# EAGLE board IIITDuino Ver0.4 (EAGLE 7.5.0)
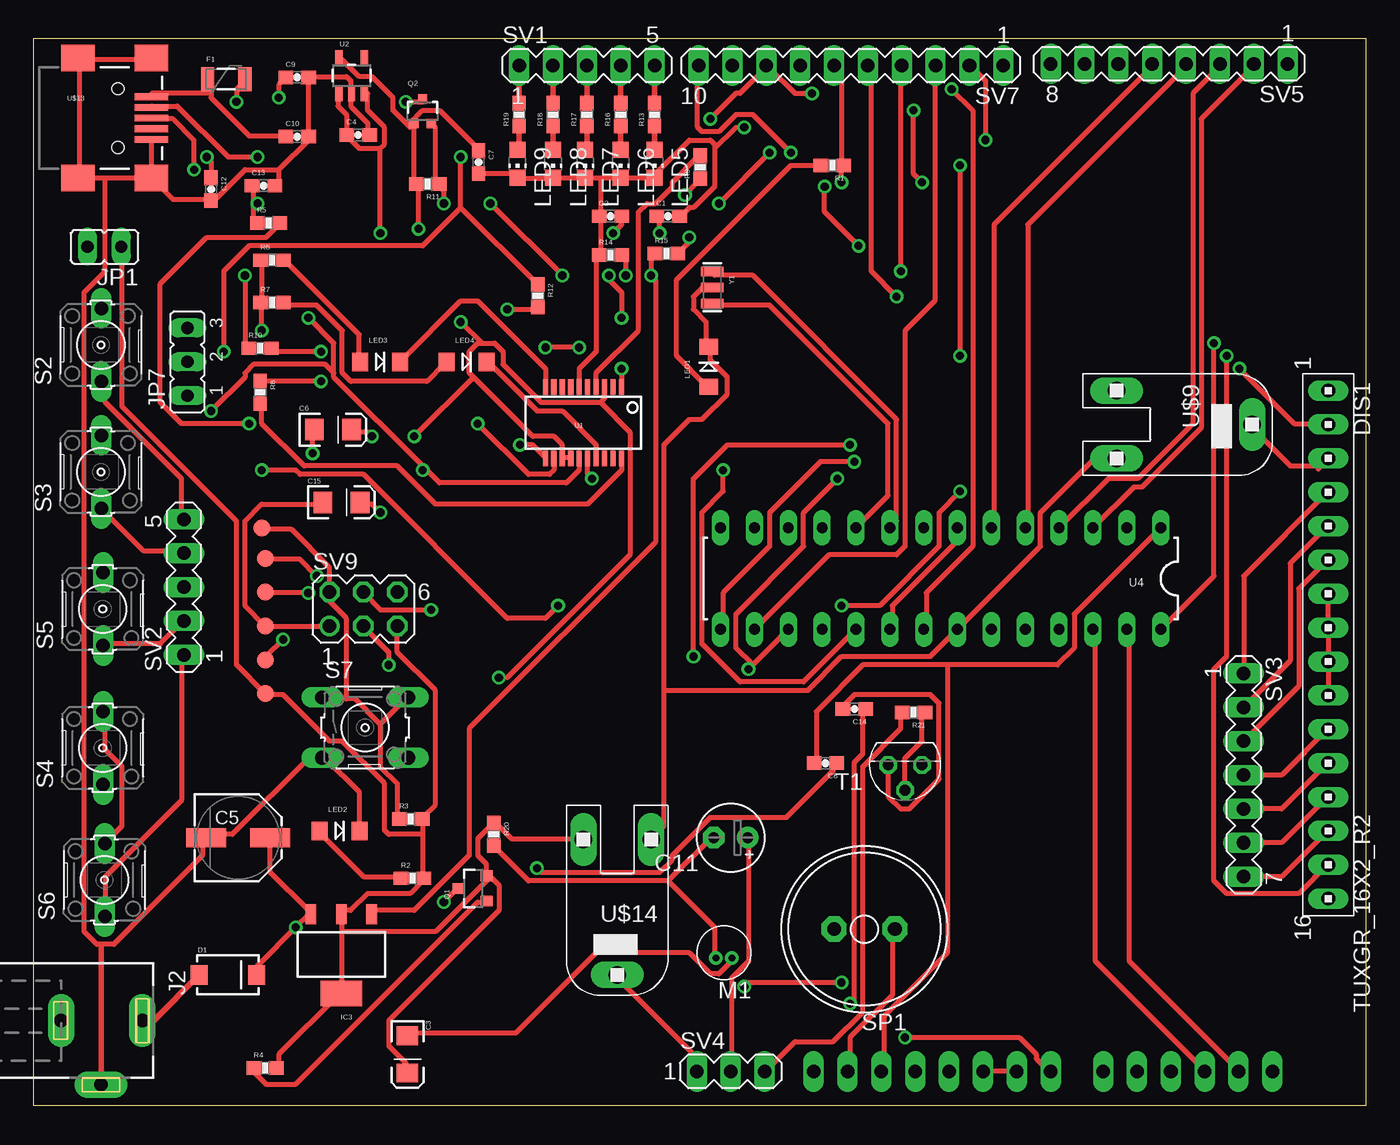
[diagram p0: board, top side]
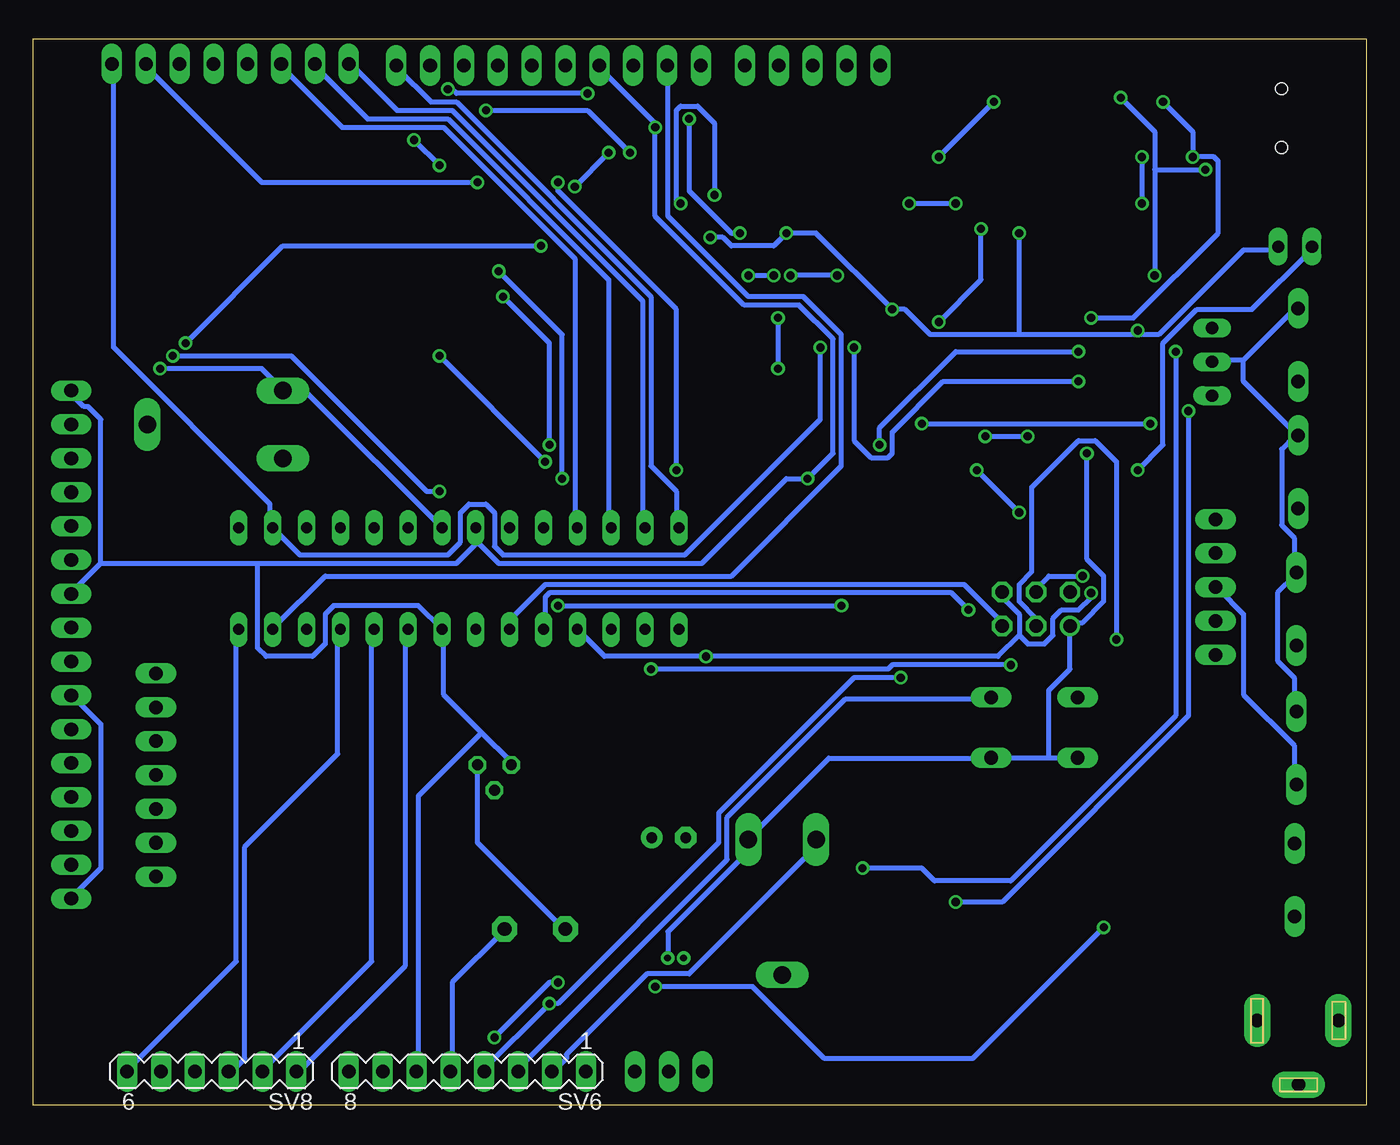
[diagram p1: board, bottom side, seen from below]

Size 100 x 80 mm. Coordinates in mm from the lower left corner, seen from the top.
Outline: 0,0 100,0 100,80 0,80 0,0
Copper layers (1*16): Top 0.035mm / dielectric 1.5mm / Bottom 0.035mm
Design rules "default": minimum track width 10mil, minimum drill 24mil, track to track 8mil, track to pad 8mil, pad to pad 8mil, via to via 8mil, smd to smd 8mil, copper to edge 40mil, drill to drill 8mil, minimum pad ring 10mil, minimum via ring 8mil, stop-mask expansion 4mil, vias tented up to drill 0mil, thermal gap 10mil
Net classes: 0 default: width 0.381 mm, drill 0.305 mm, clearance 0.254 mm

## Footprints (pad centres in the part's own frame; a part is rotated, then mirrored left to right if it is on the bottom)
0603-CAP = smd 1.1 x 1: 1 -0.85,0; 2 0.85,0
EIA3216 = smd 1.4 x 1.6: A 1.4,0; C -1.4,0
PANASONIC_D = smd 3 x 1.4: + 2.4,0; - -2.4,0
E2,5-5 = drill 0.813 pad 1.6: + -1.27,0 | drill 0.813 pad 1.6 octagon: - 1.27,0
SMA-DIODE = smd 1.27 x 1.47: A -2.15,0; C 2.15,0
LCD_16X2_PAC = drill 1.016 pad 1.422 long: 1 -21.59,0; 2 -19.05,0; 3 -16.51,0; 4 -13.97,0; 5 -11.43,0; 6 -8.89,0; 7 -6.35,0; 8 -3.81,0; 9 -1.27,0; 10 1.27,0; 11 3.81,0; 12 6.35,0; 13 8.89,0; 14 11.43,0; 15 13.97,0; 16 16.51,0
PTC-1206 = smd 1 x 1.8: 1 -1.4,0; 2 1.4,0
SOT223-ALT1 = smd 0.813 x 1.524: 1 -2.271,-3.02; 2 0,-3.02; 3 2.288,-3.02 | smd 3.124 x 1.905: 4 0,2.921
DCJ0202 = drill 1 pad 2 long: 1 0,3.1; 2 4.8,0; 3 0,-3
JP1 = drill 0.914 long: 1 0,-1.27; 2 0,1.27
JP2 = drill 0.914 long: 1 -2.54,0; 2 0,0; 3 2.54,0
LED-1206-NO_SILK = smd 1.2 x 1.4: A -1.5,0; C 1.5,0
CHIP-LED0805 = smd 1.2 x 1.2: A 0,-1.05; C 0,1.05
TOM-1545P-R = drill 0.5 pad 0.8: + 0.6,0.4; - -0.6,0.4
SOT23-3 = smd 0.8 x 0.9: 1 -0.95,-1; 2 0.95,-1; 3 0,1.1
SOT323 = smd 0.7 x 0.7: 1 -0.65,-0.925; 2 0.65,-0.925; 3 0,0.925
0603-RES = smd 1.1 x 1: 1 -0.85,0; 2 0.85,0
B3F-10XX = drill 1.016 long: 1 -2.743,-0.025; 2 2.743,-0.025
B3F-10XX' = drill 1.016 long: 1 -3.251,2.261; 2 3.251,2.261; 3 -3.251,-2.261; 4 3.251,-2.261
AL11P = drill 1.016 pad 1.905 octagon: + 2.286,0; - -2.286,0
MA05-1 = drill 1.016 long: 1 -5.08,0; 2 -2.54,0; 3 0,0; 4 2.54,0; 5 5.08,0
MA07-1 = drill 1.016 long: 1 -7.62,0; 2 -5.08,0; 3 -2.54,0; 4 0,0; 5 2.54,0; 6 5.08,0; 7 7.62,0
MA03-1 = drill 1.016 long: 1 -2.54,0; 2 0,0; 3 2.54,0
MA08-1 = drill 1.016 long: 1 -8.89,0; 2 -6.35,0; 3 -3.81,0; 4 -1.27,0; 5 1.27,0; 6 3.81,0; 7 6.35,0; 8 8.89,0
MA10-1 = drill 1.016 long: 1 -11.43,0; 2 -8.89,0; 3 -6.35,0; 4 -3.81,0; 5 -1.27,0; 6 1.27,0; 7 3.81,0; 8 6.35,0; 9 8.89,0; 10 11.43,0
MA06-1 = drill 1.016 long: 1 -6.35,0; 2 -3.81,0; 3 -1.27,0; 4 1.27,0; 5 3.81,0; 6 6.35,0
MA03-2 = drill 1.016: 1 -2.54,-1.27 | drill 1.016 octagon: 2 -2.54,1.27; 3 0,-1.27; 4 0,1.27; 5 2.54,-1.27; 6 2.54,1.27
TO92 = drill 0.813 octagon: 1 1.27,0; 2 0,1.905; 3 -1.27,0
PAD.03X.05 = smd 1.27 x 1.27: P$1 0,0
SSOP20_L = smd 0.381 x 1.143: 1 -2.857,-2.68; 2 -2.223,-2.68; 3 -1.587,-2.68; 4 -0.953,-2.68; 5 -0.318,-2.68; 6 0.318,-2.68; 7 0.953,-2.68; 8 1.587,-2.68; 9 2.223,-2.68; 10 2.857,-2.68; 11 2.857,2.68; 12 2.223,2.68; 13 1.587,2.68; 14 0.953,2.68; 15 0.318,2.68; 16 -0.318,2.68; 17 -0.953,2.68; 18 -1.587,2.68; 19 -2.223,2.68; 20 -2.857,2.68
SOT23-5 = smd 0.55 x 1.2: 1 -0.95,-1.3; 2 0,-1.3; 3 0.95,-1.3; 4 0.95,1.3; 5 -0.95,1.3
DIL28-3 = drill 0.813 long: 1 -16.51,-3.81; 2 -13.97,-3.81; 3 -11.43,-3.81; 4 -8.89,-3.81; 5 -6.35,-3.81; 6 -3.81,-3.81; 7 -1.27,-3.81; 8 1.27,-3.81; 9 3.81,-3.81; 10 6.35,-3.81; 11 8.89,-3.81; 12 11.43,-3.81; 13 13.97,-3.81; 14 16.51,-3.81; 15 16.51,3.81; 16 13.97,3.81; 17 11.43,3.81; 18 8.89,3.81; 19 6.35,3.81; 20 3.81,3.81; 21 1.27,3.81; 22 -1.27,3.81; 23 -3.81,3.81; 24 -6.35,3.81; 25 -8.89,3.81; 26 -11.43,3.81; 27 -13.97,3.81; 28 -16.51,3.81
CA9V = drill 1.321 long: A -2.54,-5.08; K 2.54,-5.08; S 0,5.08
USB-MINIB = smd 2.5 x 0.5: D+ 2.5,0; D- 2.5,0.8; GND 2.5,-1.6; ID 2.5,-0.8; VBUS 2.5,1.6 | smd 2.5 x 2: MTN1 -3,4.5; MTN2 2.5,4.5; MTN3 -3,-4.5; MTN4 2.5,-4.5 | hole 0.9: 0,2.2; 0,-2.2
RESONATOR-SMD = smd 0.7 x 1.7: 1 -1.2,0; 2 0,0; 3 1.2,0

## Placement (x,y rotation side)
C1  0.1uF  [0603-CAP]  47.62,66.67 0 top
C2  0.1uF  [0603-CAP]  43.31,66.67 0 top
C3  10uF  [EIA3216]  28.07,3.81 270 top
C4  0.1uF  [0603-CAP]  24.38,72.77 0 top
C5  47uF  [PANASONIC_D]  15.37,20.07 0 top
C6  10uF  [EIA3216]  22.48,50.67 0 top
C7  1uF  [0603-CAP]  33.4,70.74 270 top
C8  0.1uF  [0603-CAP]  59.44,25.65 180 top
C9  47pF  [0603-CAP]  19.81,77.09 0 top
C10  0.1uF  [0603-CAP]  19.81,72.64 0 top
C11  [E2,5-5]  52.32,20.07 180 top
C12  0.1uF  [0603-CAP]  13.34,68.71 270 top
C13  47pF  [0603-CAP]  17.27,68.96 0 top
C14  0.1uF  [0603-CAP]  61.59,29.72 180 top
C15  10uF  [EIA3216]  23.11,45.21 0 top
D1  MBRA140  [SMA-DIODE]  14.61,9.78 0 top
DIS1  TUXGR_16X2_R2  [LCD_16X2_PAC]  97.16,32 270 top
F1  500mA  [PTC-1206]  14.48,76.96 0 top
FRAME2  FRAME-LETTER  [CREATIVE_COMMONS]  -15.24,21.59 90 top  (outside the outline)
IC3  LM1117  [SOT223-ALT1]  23.11,11.3 180 top
J2  DCJ0202  [DCJ0202]  5.08,6.35 270 top
JP1  [JP1]  5.33,64.39 90 top
JP7  [JP2]  11.56,55.75 90 top
LED1  Blue  [LED-1206-NO_SILK]  50.67,55.37 90 top
LED2  Green  [LED-1206-NO_SILK]  22.99,20.57 0 top
LED3  Red  [LED-1206-NO_SILK]  26.04,55.75 0 top
LED4  Yellow  [LED-1206-NO_SILK]  32.51,55.75 0 top
LED5  [CHIP-LED0805]  46.61,70.61 180 top
LED6  [CHIP-LED0805]  44.07,70.61 180 top
LED7  [CHIP-LED0805]  41.4,70.61 180 top
LED8  [CHIP-LED0805]  38.99,70.61 180 top
LED9  [CHIP-LED0805]  36.32,70.61 180 top
M1  ELECTRET_MICROPHON-TOM-1545P-R  [TOM-1545P-R]  51.82,11.43 180 top
Q1  ZXMP6A13FTA  [SOT23-3]  33.02,16.26 90 top
Q2  2N7002PW  [SOT323]  29.21,74.55 0 top
R1  1k  [0603-RES]  59.94,70.48 180 top
R2  1k  [0603-RES]  28.45,17.02 0 top
R3  10k  [0603-RES]  28.32,21.46 0 top
R4  10k  [0603-RES]  17.4,2.79 0 top
R5  27  [0603-RES]  17.65,66.17 0 top
R6  1k  [0603-RES]  17.91,63.37 0 top
R7  1k  [0603-RES]  17.91,60.2 0 top
R8  1k  [0603-RES]  17.02,53.47 270 top
R9  1k  [0603-RES]  50.04,70.36 90 top
R10  27  [0603-RES]  17.02,56.77 0 top
R11  10k  [0603-RES]  29.59,69.09 180 top
R12  10k  [0603-RES]  37.85,60.71 270 top
R13  1k  [0603-RES]  46.61,74.3 90 top
R14  715  [0603-RES]  43.31,63.75 0 top
R15  240  [0603-RES]  47.5,63.88 0 top
R16  1k  [0603-RES]  44.07,74.3 90 top
R17  1k  [0603-RES]  41.53,74.3 90 top
R18  1k  [0603-RES]  38.99,74.3 90 top
R19  1k  [0603-RES]  36.45,74.3 90 top
R20  1k  [0603-RES]  34.54,20.32 270 top
R21  1k  [0603-RES]  66.04,29.46 180 top
S2  [B3F-10XX]  5.08,57.02 90 top
S3  [B3F-10XX]  5.08,47.5 90 top
S4  [B3F-10XX]  5.21,26.8 90 top
S5  [B3F-10XX]  5.21,37.21 90 top
S6  [B3F-10XX]  5.33,16.89 90 top
S7  [B3F-10XX']  24.89,28.32 0 top
SP1  AL11P  [AL11P]  62.36,13.21 180 top
SV1  [MA05-1]  41.53,77.98 0 top
SV2  [MA05-1]  11.3,38.86 90 top
SV3  [MA07-1]  90.81,24.77 270 top
SV4  [MA03-1]  52.32,2.54 0 top
SV5  [MA08-1]  85.22,78.11 180 top
SV6  [MA08-1]  67.44,2.54 180 bottom
SV7  [MA10-1]  61.34,77.98 180 top
SV8  [MA06-1]  86.61,2.54 180 bottom
SV9  [MA03-2]  24.77,37.21 0 top
T1  BC547  [TO92]  65.41,25.53 180 top
TP1  TP-3x5  [PAD.03X.05]  17.4,30.86 0 top
TP2  TP-3x5  [PAD.03X.05]  17.4,33.4 0 top
TP3  TP-3x5  [PAD.03X.05]  17.4,35.94 0 top
TP4  TP-3x5  [PAD.03X.05]  17.4,38.48 0 top
TP5  TP-3x5  [PAD.03X.05]  17.4,41.02 0 top
TP6  TP-3x5  [PAD.03X.05]  17.14,43.31 0 top
U1  FT231XS  [SSOP20_L]  41.27,51.18 180 top
U2  MIC5205  [SOT23-5]  23.88,77.22 0 top
U4  ATMEGA328P_PDIP  [DIL28-3]  68.07,39.5 180 top
U$9  POT  [CA9V]  86.36,51.05 270 top
U$13  USB-MINIB-5PIN  [USB-MINIB]  6.35,74.04 0 top
U$14  POT  [CA9V]  43.81,14.86 180 top
Y1  16MHz  [RESONATOR-SMD]  50.93,61.34 270 top

## Library data of the parts
C1-C8 C10 C12 C14 D1 F1 Q1 R1-R4 R6-R9 R11-R21 U2 = SparkFun
C9 C13 = SparkFun-Capacitors; PROD_ID: CAP-08913
C11 = rcl
C15 = SparkFun-Capacitors
DIS1 = lcd_16X2
FRAME2 = SparkFun-Aesthetics
IC3 = Testing
J2 = dc-jack
JP1 JP7 = jumper
LED1-LED4 = SparkFun-LED
LED5-LED9 = led
M1 = microphon
Q2 = SparkFun-DiscreteSemi; PROD_ID: TRANS-11151
R5 R10 = SparkFun-Resistors
S2-S6 = switch
S7 = switch-omron; MPN: B3F-1000; OC_FARNELL: 176432; OC_NEWARK: 36M3542
SP1 = buzzer; OC_FARNELL: unknown; OC_NEWARK: unknown
SV1-SV9 = con-lstb; OC_FARNELL: unknown; OC_NEWARK: unknown
T1 = transistor
TP1-TP6 = SparkFun-Passives
U1 U4 = SparkFun-DigitalIC
U$9 U$14 = potentiometer
U$13 = SparkFun-Connectors
Y1 = SparkFun-FreqCtrl

## Nets
3.3V: C6.A C7.1 C14.1 Q2.1 R11.2 SV6.4 U1.3 U1.13 U1.14 U2.5
5V: C2.2 C3.A C4.1 DIS1.2 IC3.2 IC3.4 JP1.1 Q1.2 R2.2 R3.2 R4.2 R6.1 R7.1 R12.2 R15.2 R20.1 SP1.- SV6.2 SV6.5 SV9.5 TP1.P$1 U2.1 U2.3 U4.7 U4.20 U$9.A U$14.K
AD0: SV8.1 U4.23
AD1: SV8.2 U4.24
AD2: SV8.3 U4.25
AD3: SV8.4 U4.26
AD4/SDA: SV7.9 SV8.5 U4.27
AD5/SCL: SV7.10 SV8.6 U4.28
AREF: C1.1 SV7.8 U4.21
BUZ: R21.2 SV4.3
D4: DIS1.11 SV3.4
D5: DIS1.12 SV3.5
D6: DIS1.13 SV3.6
D7: DIS1.14 SV3.7
D+: C9.1 R10.1 U$13.D+
D-: C13.1 R5.1 U$13.D-
DTR: C8.1 Q2.3 R12.1
E: DIS1.6 SV3.3
GND: C1.2 C2.1 C3.C C4.2 C5.- C6.C C7.2 C9.2 C10.2 C12.2 C13.2 C14.2 C15.C DIS1.1 DIS1.7 DIS1.8 DIS1.9 DIS1.10 DIS1.16 J2.2 LED1.C LED2.C LED5.C LED6.C LED7.C LED8.C LED9.C M1.- R14.1 S7.3 S7.4 SV6.6 SV6.7 SV7.7 SV9.1 T1.1 TP3.P$1 U1.6 U1.16 U2.2 U4.8 U4.22 U$9.K U$13.GND U$13.MTN1 U$13.MTN2 U$13.MTN3 U$13.MTN4 U$14.A Y1.2
INSERT: Q1.1 R4.1
IO2: SV5.3 U4.4
IO3: SV5.4 U4.5
IO4: SV5.5 U4.6
IO5: SV5.6 U4.11
IO6: SV5.7 U4.12
IO7: SV5.8 U4.13
IO8: SV7.1 U4.14
IO9: SV7.2 U4.15
MIC: C11.+ SV4.2
MISO: SV7.5 SV9.6 TP4.P$1 U4.18
MOSI: SV7.4 SV9.3 TP2.P$1 U4.17
N$1: LED1.A R1.2
N$2: LED2.A R2.1
N$3: U4.9 Y1.1
N$4: U4.10 Y1.3
N$5: DIS1.3 U$9.S
N$6: R5.2 U1.12
N$7: R10.2 U1.11
N$8: LED3.A R6.2
N$10: LED4.A R7.2
N$12: Q2.2 R11.1 U1.1
N$15: IC3.1 R14.2 R15.1
N$19: DIS1.15 JP1.2
N$20: S2.1 SV2.5
N$21: LED5.A R13.1
N$22: LED6.A R16.1
N$23: LED7.A R17.1
N$24: LED8.A R18.1
N$25: LED9.A R19.1
N$26: R13.2 SV1.5
N$27: R16.2 SV1.4
N$28: R17.2 SV1.3
N$29: R18.2 SV1.2
N$30: R19.2 SV1.1
N$32: S3.1 SV2.4
N$33: S4.1 SV2.3
N$34: S5.1 SV2.2
N$35: S6.1 SV2.1
N$36: JP7.2 S2.2 S3.2 S4.2 S5.2 S6.2
N$37: JP7.1
N$38: JP7.3
N$39: SP1.+ T1.3
N$41: C11.- M1.+ R20.2
N$42: R21.1 T1.2
POT: SV4.1 U$14.S
PWRIN: D1.A J2.1
R/W: DIS1.5 SV3.2
RESET: C8.2 R3.1 S7.1 S7.2 SV6.3 SV9.2 TP6.P$1 U4.1
RS: DIS1.4 SV3.1
RX-I: R8.1 SV5.1 U4.2
RXD: R9.2 U1.4
RXLED: LED4.C U1.17
S$2: J2.3
SCK: R1.1 SV7.6 SV9.4 TP5.P$1 U4.19
SS: SV7.3 U4.16
TX-O: R9.1 SV5.2 U4.3
TXD: R8.2 U1.20
TXLED: LED3.C U1.10
USBVCC: C12.1 C15.A F1.2 Q1.3 U1.15
VIN: C5.+ D1.C IC3.3 SV6.8
VUSB: C10.1 F1.1 U$13.VBUS

## Tracks (layer width: path | path; a pad name or v marks a point on that pad's centre or on a via)
3.3V  (via drill 0.61)
  Top 0.381: v61.28,7.62 61.59,7.94 61.59,25.72 62.23,26.35 62.23,29.53 C14.1 | Q2.1 28.57,73.34 28.57,69.22 R11.2 28.89,68.9 v28.89,65.72 | C7.1 33.34,71.75 30.48,74.61 29.21,74.61 28.26,73.66 Q2.1 | U2.5 23.18,78.42 24.45,77.15 25.4,77.15 26.99,75.56 26.99,74.61 28.26,73.34 Q2.1 | 39.69,48.58 40.32,48.58 U1.14 | U1.3 42.86,53.02 42.55,52.7 | 42.55,52.7 38.1,52.7 35.24,55.56 35.24,56.52 34.61,57.15 33.66,57.15 | 33.66,57.15 33.34,57.15 32.7,56.52 32.7,54.93 33.02,54.61 | 33.02,54.61 37.47,50.16 39.05,50.16 39.69,49.53 39.69,48.58 | 39.69,48.58 U1.13 | v25.4,50.16 25.08,50.48 24.13,50.48 C6.A | 33.02,54.61 v28.57,50.16 | 33.66,57.15 v32.07,58.74 | v34.92,32.07 35.56,32.07 44.77,41.27 44.77,50.48 42.55,52.7
  Bottom 0.381: SV6.4 66.36,2.54 v61.28,7.62 60.64,7.62 48.58,19.68 48.58,21.91 38.42,32.07 v34.92,32.07 | v28.57,50.16 v25.4,50.16 | v28.89,65.72 28.89,61.91 v32.07,58.74
5V  (via drill 0.61)
  Top 0.381: U2.1 22.86,75.88 22.86,74.93 23.5,74.3 23.5,73.03 C4.1 23.5,72.71 24.45,71.75 26.04,71.75 | 26.04,71.75 26.35,72.07 26.35,73.34 25.08,74.61 25.08,75.88 U2.3 | R6.1 17.14,63.18 17.14,60.33 R7.1 17.14,60.01 v17.14,58.1 | v35.56,59.69 37.78,59.69 R12.2 | v43.5,65.41 44.13,66.04 44.13,66.67 C2.2 | v49.21,65.09 49.21,64.77 48.58,64.14 R15.2 | v26.04,65.41 26.04,71.75 | U4.20 64.45,35.88 64.45,37.47 69.22,42.23 69.22,43.18 U4.7 | v90.49,55.24 94.61,51.12 97.16,51.12 DIS1.2 | R4.2 18.41,2.86 18.41,3.81 22.86,8.26 IC3.4 23.18,8.57 23.18,13.02 | 23.18,13.02 23.18,14.29 IC3.2 23.18,14.61 23.81,14.61 25.08,15.88 28.26,15.88 29.21,16.83 R2.2 29.21,17.14 29.21,20.32 | 29.21,20.32 29.21,21.27 R3.2 29.21,21.59 30.16,22.54 30.16,31.11 27.3,33.97 SV9.5 | 29.21,20.32 26.67,20.32 26.35,20.64 26.35,24.13 23.18,27.3 22.23,27.3 18.73,30.8 17.46,30.8 TP1.P$1 15.24,33.02 15.24,43.81 6.67,52.39 6.67,64.14 JP1.1 | SV6.2 61.28,2.54 61.28,5.08 64.45,8.26 64.45,13.02 SP1.- | 34.29,17.14 34.92,16.51 34.92,14.61 26.67,6.35 26.67,4.45 27.94,3.17 27.94,2.54 C3.A | U$14.K 41.27,20 35.88,20 34.61,21.27 R20.1 34.29,20.95 33.34,20 33.34,18.73 33.97,18.1 33.97,17.46 Q1.2 34.29,17.14 | 23.18,13.02 30.16,13.02 34.29,17.14
  Bottom 0.381: 17.14,57.78 15.56,57.78 9.21,64.14 6.67,64.14 JP1.1 | 17.14,57.78 26.04,57.78 | 26.04,57.78 32.7,57.78 34.61,59.69 v35.56,59.69 41.27,65.41 v43.5,65.41 44.45,64.45 47.62,64.45 48.26,65.09 v49.21,65.09 | 17.14,57.78 v17.14,58.1 | 26.04,57.78 v26.04,65.41 | v90.49,55.24 82.87,55.24 81.28,53.66 U$9.A 81.28,53.34 79.38,53.34 U4.7 | SV6.5 68.58,2.54 68.58,9.21 64.77,13.02 SP1.- | U$14.K 41.27,19.37 50.8,9.84 53.98,9.84 60.01,3.81 60.01,3.49 60.96,2.54 SV6.2 | U4.20 64.14,35.88 64.14,36.51 61.59,39.05 30.16,39.05 27.3,36.2 SV9.5
AD0
  Bottom 0.381: U4.23 72.07,35.56 72.07,10.48 80.01,2.54 SV8.1
AD1
  Bottom 0.381: U4.24 74.61,35.56 74.61,10.79 82.87,2.54 SV8.2
AD2
  Bottom 0.381: U4.25 77.15,35.56 77.15,26.35 84.14,19.37 84.14,3.49 85.09,2.54 SV8.3
AD3
  Top 0.381: U4.26 79.69,35.56 79.69,10.79 87.95,2.54 SV8.4
AD4/SDA
  Top 0.381: U4.27 82.23,35.56 82.23,10.79 90.49,2.54 SV8.5
  Bottom 0.381: SV7.9 52.39,77.79 52.39,66.67 46.35,60.64 42.23,60.64 39.37,57.78 39.37,47.94 47.62,39.69 78.11,39.69 81.92,35.88 U4.27
AD5/SCL  (via drill 0.61)
  Top 0.381: v56.83,71.44 53.98,74.3 52.7,74.3 51.44,73.03 50.16,73.03 49.85,73.34 49.85,77.79 SV7.10 | v59.37,68.9 59.37,66.99 v61.91,64.45 | v88.58,57.15 88.58,39.69 U4.28
  Bottom 0.381: U4.28 84.77,35.56 84.77,10.79 93.03,2.54 SV8.6 | v59.37,68.9 v56.83,71.44 | v61.91,64.45 81.28,64.45 v88.58,57.15
AREF  (via drill 0.61)
  Top 0.381: v46.99,65.41 46.99,66.67 C1.1 | v50.8,73.98 52.7,75.88 53.02,75.88 54.93,77.79 SV7.8 55.24,77.79 57.15,75.88 v58.42,75.88 | v68.9,76.2 70.48,74.61 70.48,41.91 66.99,38.42 66.99,35.88 U4.21
  Bottom 0.381: v46.99,65.41 47.62,65.41 50.8,68.58 v50.8,73.98 | v68.9,76.2 68.58,76.2 68.26,75.88 v58.42,75.88
BUZ
  Top 0.381: R21.2 65.09,29.21 65.09,28.26 62.23,25.4 62.23,6.99 60.01,4.76 57.15,4.76 54.93,2.54 SV4.3
D4
  Top 0.381: SV3.4 93.66,24.77 97.16,28.26 DIS1.11
D5
  Top 0.381: SV3.5 93.66,22.23 97.16,25.72 DIS1.12
D6
  Top 0.381: SV3.6 93.66,19.68 97.16,23.18 DIS1.13
D7
  Top 0.381: SV3.7 93.66,17.14 97.16,20.64 DIS1.14
D+  (via drill 0.61)
  Top 0.381: v15.88,62.23 15.88,56.83 R10.1 | v18.41,75.56 18.41,76.52 18.73,76.83 C9.1 | v12.06,70.17 12.06,72.39 10.48,73.98 8.89,73.98 U$13.D+
  Bottom 0.381: 15.88,70.17 15.88,73.03 v18.41,75.56 | 15.88,70.17 v15.88,62.23 | 15.88,70.17 v12.06,70.17
D-  (via drill 0.61)
  Top 0.381: 16.51,67.63 16.51,68.9 C13.1 | 16.51,67.63 16.51,66.36 R5.1 | v16.83,67.63 16.51,67.63 | v16.83,71.12 14.61,71.12 10.79,74.93 8.89,74.93 U$13.D-
  Bottom 0.381: v16.83,71.12 v16.83,67.63
DTR  (via drill 0.61)
  Top 0.381: v27.94,75.25 29.21,75.25 Q2.3 | 32.07,67.31 v32.07,71.12 | 32.07,67.31 37.78,61.59 R12.1 | v37.78,17.78 38.1,17.46 46.99,17.46 47.94,18.41 47.94,18.73 50.8,21.59 56.52,21.59 60.01,25.08 60.01,25.4 C8.1 | v14.29,56.52 14.29,62.55 16.19,64.45 29.21,64.45 32.07,67.31
  Bottom 0.381: v32.07,71.12 v27.94,75.25 | v37.78,17.78 33.34,17.78 32.38,16.83 26.67,16.83 14.29,29.21 v14.29,56.52
E
  Top 0.381: SV3.3 94.93,31.43 94.93,38.73 97.16,40.96 DIS1.6
GND  (via drill 0.61)
  Top 0.381: 42.55,66.67 42.55,63.82 R14.1 42.23,63.5 42.23,56.52 40.96,55.24 U1.6 | C7.2 33.66,69.85 36.2,69.85 LED9.C 36.51,69.53 38.73,69.53 LED8.C 39.05,69.53 41.27,69.53 LED7.C 41.59,69.53 42.55,69.53 | 51.12,71.75 51.12,72.07 50.8,72.39 49.21,72.39 46.67,69.85 LED5.C 46.35,69.53 44.13,69.53 LED6.C 43.81,69.53 42.55,69.53 | 51.12,71.75 51.12,68.9 49.53,67.31 49.21,67.31 48.58,66.67 C1.2 | v53.34,73.34 52.7,73.34 51.12,71.75 | 42.55,69.53 42.55,66.67 | 42.55,66.67 C2.1 | U1.16 41.59,47.31 v41.91,46.99 | DIS1.7 DIS1.8 DIS1.9 DIS1.10 | C4.2 25.08,73.03 25.08,73.66 23.81,74.93 23.81,75.88 U2.2 23.81,76.2 23.81,76.83 23.5,77.15 20.95,77.15 C9.2 20.64,76.83 20.64,72.71 C10.2 20.64,72.39 18.41,70.17 | 18.41,70.17 18.41,69.22 C13.2 | 3.49,78.42 8.57,78.42 U$13.MTN2 | U$13.MTN4 8.89,69.53 10.48,67.94 13.34,67.94 C12.2 13.34,67.63 15.88,70.17 18.41,70.17 | 5.4,69.53 8.57,69.53 U$13.MTN4 | 5.4,69.53 3.49,69.53 U$13.MTN3 3.49,69.85 3.49,78.42 | U$13.GND 8.89,72.39 8.89,69.85 U$13.MTN4 | 3.49,78.42 U$13.MTN1 | SV9.1 22.23,35.88 17.46,35.88 TP3.P$1 15.88,37.47 15.88,43.81 17.14,45.09 21.59,45.09 C15.C | v20.95,48.9 20.95,50.48 C6.C | LED2.C 24.45,20.64 24.45,23.5 21.91,26.04 S7.3 21.59,26.04 20.64,26.04 14.92,20.32 13.02,20.32 C5.- 12.7,20 12.7,18.73 6.03,12.06 5.21,12.06 4.76,12.06 3.81,13.02 3.81,60.96 5.4,62.55 5.4,69.53 | SV6.7 SV6.6 | T1.1 64.14,23.18 65.09,22.23 65.72,22.23 67.94,24.45 67.94,30.16 67.31,30.8 61.59,30.8 60.96,30.16 60.96,29.84 C14.2 | U$9.K 81.28,48.26 79.38,48.26 75.56,44.45 75.56,41.91 U4.22 67.31,33.66 60.64,33.66 58.1,31.11 47.31,31.11 | C3.C 28.26,5.4 36.2,5.4 42.23,11.43 49.21,11.43 50.8,9.84 51.44,9.84 52.39,10.79 M1.-
  Top 0.381: Y1.2 50.8,61.28 50.16,61.28 49.53,60.64 49.53,59.69 50.48,58.74 50.48,57.15 LED1.C 50.8,56.83 50.8,55.88 52.07,54.61 52.07,53.34 50.16,51.44 49.21,51.44 47.31,49.53 47.31,31.11 | 47.31,31.11 47.31,20.95 46.35,20 U$14.A
  Top 0.406: J2.2 5.08,11.94 5.21,12.06
  Bottom 0.381: SV7.7 57.47,77.79 53.34,73.66 v53.34,73.34 53.34,66.67 46.67,60.01 42.55,60.01 40.01,57.47 40.01,48.9 v41.91,46.99 43.5,46.99 49.85,40.64 65.09,40.64 66.67,42.23 | 66.67,42.23 66.67,43.18 U4.8 66.67,42.23 | DIS1.16 97.16,15.56 94.93,17.78 94.93,28.57 97.16,30.8 DIS1.10 | 94.93,40.64 94.93,51.44 95.89,52.39 96.2,52.39 97.16,53.34 DIS1.1 | 94.93,40.64 97.16,38.42 DIS1.7 | 66.67,42.23 68.26,40.64 83.19,40.64 | 94.93,40.64 83.19,40.64 | v20.95,48.9 20.95,40.96 19.68,39.69 19.68,37.78 21.27,36.2 22.23,36.2 SV9.1 22.23,32.7 23.81,31.11 23.81,26.04 | 23.81,26.04 21.91,26.04 S7.3 | 23.81,26.04 27.94,26.04 S7.4 28.26,26.04 40.32,26.04 46.35,20 U$14.A 46.35,19.05 52.39,13.02 52.39,11.11 M1.- | 66.36,27.94 64.14,25.72 T1.1 | 66.36,27.94 69.22,30.8 69.22,35.56 U4.22 71.12,37.47 77.47,37.47 78.11,36.83 78.11,34.61 79.06,33.66 82.55,33.66 83.19,34.29 83.19,40.64 | 66.36,27.94 71.12,23.18 71.12,2.54 SV6.6
INSERT
  Top 0.381: Q1.1 33.97,15.24 33.34,15.24 19.68,1.59 17.46,1.59 16.51,2.54 R4.1
IO2
  Top 0.381: U4.4 80.64,46.99 82.87,46.99 87,51.12 87,75.88 89.22,78.11 SV5.3
IO3
  Top 0.381: U4.5 74.61,43.5 74.61,66.04 86.68,78.11 SV5.4
IO4
  Top 0.381: U4.6 72.07,43.5 72.07,66.04 84.14,78.11 SV5.5
IO5
  Bottom 0.381: U4.11 59.37,43.5 59.37,63.5 69.22,73.34 76.83,73.34 81.6,78.11 SV5.6
IO6
  Bottom 0.381: U4.12 56.83,43.5 56.83,61.91 68.9,73.98 74.93,73.98 79.06,78.11 SV5.7
IO7
  Bottom 0.381: U4.13 54.29,43.5 54.29,60.33 68.58,74.61 72.71,74.61 76.2,78.11 SV5.8
IO8
  Bottom 0.381: U4.14 51.75,43.5 51.75,46.04 53.66,47.94 53.66,60.64 68.26,75.25 70.17,75.25 72.71,77.79 SV7.1
IO9  (via drill 0.61)
  Top 0.381: v61.59,48.26 59.05,48.26 55.24,44.45 55.24,41.91 51.75,38.42 51.75,35.88 U4.15 | v69.53,70.48 v69.53,56.2 | v71.44,72.39 71.44,76.83 70.48,77.79 SV7.2
  Bottom 0.381: v69.53,56.2 v61.59,48.26 | v71.44,72.39 v69.53,70.48
MIC
  Top 0.381: SV4.2 52.39,2.54 52.39,9.53 53.66,10.79 53.66,20 C11.+
MISO  (via drill 0.61)
  Top 0.381: v20.64,38.42 17.46,38.42 TP4.P$1 | v64.77,60.64 62.87,62.55 62.87,77.79 SV7.5 | v61.28,49.53 52.07,49.53 49.53,46.99 v49.53,33.66
  Bottom 0.381: v20.64,38.42 20.64,38.1 21.59,37.15 22.86,37.15 23.5,36.51 23.5,35.24 24.13,34.61 25.4,34.61 26.04,35.24 | 26.04,35.24 26.04,36.83 27.3,38.1 SV9.6 | U4.18 57.15,33.66 v49.53,33.66 27.62,33.66 26.04,35.24 | v64.77,60.64 61.28,57.15 v61.28,49.53
MOSI  (via drill 0.61)
  Top 0.381: v18.73,34.92 17.46,33.66 TP2.P$1 | 53.98,33.02 U4.17 | v26.67,33.02 26.67,33.97 24.77,35.88 SV9.3 | v65.09,62.55 65.09,77.79 SV7.4 | v60.33,46.99 57.78,44.45 57.78,41.91 52.7,36.83 52.7,34.29 53.98,33.02 | 53.98,33.02 v53.66,32.7
  Bottom 0.381: v18.73,34.92 18.73,48.26 20.32,49.85 21.59,49.85 25.08,46.35 25.08,40.01 26.04,39.05 26.04,37.78 24.77,36.51 SV9.3 | v53.66,32.7 35.88,32.7 35.56,33.02 v26.67,33.02 | v65.09,62.55 60.33,57.78 v60.33,46.99
N$1
  Top 0.381: R1.2 56.83,70.48 48.26,61.91 48.26,56.2 50.48,53.98 LED1.A
N$2
  Top 0.381: R2.1 27.3,17.14 24.77,17.14 21.59,20.32 LED2.A
N$3
  Top 0.381: U4.9 64.77,43.81 64.77,51.44 53.98,62.23 51.12,62.23 Y1.1
N$4
  Top 0.381: U4.10 64.14,45.72 64.14,51.12 55.24,60.01 51.12,60.01 Y1.3
N$5
  Top 0.381: DIS1.3 96.52,47.94 94.3,47.94 91.44,50.8 U$9.S
  Top 0.406: 96.39,47.75 DIS1.3
N$6  (via drill 0.61)
  Top 0.381: v16.19,51.12 11.11,51.12 9.53,52.7 9.53,61.59 13.02,65.09 17.46,65.09 18.41,66.04 R5.2 | v33.34,51.12 37.15,47.31 38.73,47.31 39.05,47.62 U1.12
  Bottom 0.381: v33.34,51.12 v16.19,51.12
N$7  (via drill 0.61)
  Top 0.381: v21.59,56.52 18.1,56.52 R10.2 | v36.51,49.53 37.47,49.53 38.42,48.58 U1.11
  Bottom 0.381: v21.59,56.52 30.8,56.52 36.51,50.8 v36.51,49.53
N$8
  Top 0.381: R6.2 19.05,63.18 24.45,57.78 24.45,55.88 LED3.A
N$10
  Top 0.381: R7.2 19.05,60.01 21.27,60.01 23.18,58.1 23.18,54.93 23.81,54.29 29.53,54.29 30.8,55.56 LED4.A
N$12  (via drill 0.61)
  Top 0.381: Q2.2 30.16,73.34 30.16,69.22 R11.1 30.48,68.9 30.8,68.58 v30.8,67.63 | v44.13,55.24 U1.1 | v44.13,59.05 44.13,60.96 43.18,61.91 v43.18,62.23 | v34.29,67.63 v39.69,62.23
  Bottom 0.381: v44.13,59.05 v44.13,55.24 | v39.69,62.23 v43.18,62.23 | v30.8,67.63 v34.29,67.63
N$15  (via drill 0.61)
  Top 0.381: v44.45,62.23 44.45,63.5 R14.2 | R15.1 46.35,63.82 v46.35,62.23 46.67,61.91 46.67,42.23 32.7,28.26 32.7,18.73 28.57,14.61 25.4,14.61 IC3.1
  Bottom 0.381: v46.35,62.23 v44.45,62.23
N$19  (via drill 0.61)
  Top 0.381: v17.14,47.62 19.68,47.62 20,47.31 24.77,47.31 35.56,36.51 38.42,36.51 v39.37,37.47 | v60.64,37.47 63.5,37.47 67.94,41.91 67.94,44.45 v69.53,46.04 | v89.53,56.2 89.53,33.66 88.58,32.7 88.58,16.83 89.53,15.88 94.93,15.88 97.16,18.1 DIS1.15
  Bottom 0.381: v17.14,47.62 15.24,49.53 15.24,57.15 12.7,59.69 8.57,59.69 4.13,64.14 JP1.2 | v60.64,37.47 v39.37,37.47 | v69.53,46.04 70.48,46.04 80.64,56.2 v89.53,56.2
N$20
  Top 0.381: S2.1 5.4,53.98 5.4,52.7 11.11,46.99 11.11,44.13 SV2.5
N$21
  Top 0.406: R13.1 LED5.A
N$22
  Top 0.406: R16.1 LED6.A
N$23
  Top 0.406: R17.1 41.53,71.79 LED7.A
N$24
  Top 0.406: R18.1 LED8.A
N$25
  Top 0.406: R19.1 36.45,71.79 LED9.A
N$26
  Top 0.406: SV1.5 R13.2
N$27
  Top 0.406: SV1.4 R16.2
N$28
  Top 0.406: SV1.3 R17.2
N$29
  Top 0.406: SV1.2 R18.2
N$30
  Top 0.406: SV1.1 R19.2
N$32
  Top 0.381: SV2.4 11.11,41.59 8.26,41.59 5.4,44.45 S3.1
N$33
  Bottom 0.381: S4.1 5.4,24.13 5.4,26.99 9.21,30.8 9.21,36.83 11.11,38.73 SV2.3
N$34
  Top 0.381: S5.1 5.4,34.61 9.53,34.61 11.11,36.2 SV2.2
N$35
  Top 0.381: S6.1 5.4,14.29 5.4,17.14 11.11,22.86 11.11,33.66 SV2.1
N$36
  Top 0.381: S4.2 5.4,29.53 5.4,26.67 6.67,25.4 6.67,20.95 5.4,19.68 S6.2
  Bottom 0.381: 9.21,55.88 11.43,55.88 JP7.2 | 9.21,55.88 5.4,59.69 S2.2 | S4.2 5.4,29.84 5.4,32.07 6.67,33.34 6.67,38.42 5.4,39.69 S5.2 5.4,40.01 5.4,42.55 6.35,43.5 6.35,49.21 5.4,50.16 S3.2 5.4,50.48 9.21,54.29 9.21,55.88
N$39
  Bottom 0.381: T1.3 66.67,19.68 60.33,13.34 SP1.+
N$41
  Top 0.381: 47.62,16.83 37.15,16.83 34.61,19.37 R20.2 | 47.62,16.83 50.8,20 C11.- | 47.62,16.83 51.12,13.34 51.12,11.11 M1.+
N$42
  Top 0.381: T1.2 65.41,26.04 66.67,27.3 66.67,29.21 R21.1
POT
  Top 0.381: SV4.1 49.53,2.54 49.53,3.81 43.81,9.53 U$14.S
PWRIN
  Top 0.406: J2.1 9.03,6.35 D1.A
R/W
  Top 0.381: SV3.2 94.3,33.34 94.3,40.64 97.16,43.5 DIS1.5
RESET
  Top 0.381: TP6.P$1 17.14,43.18 19.37,43.18 22.23,40.32 SV9.2 22.23,37.78 23.5,36.51 23.5,30.48 | 26.04,28.57 26.04,25.4 27.3,24.13 27.3,21.59 R3.1 | 26.04,28.57 27.94,30.48 S7.2 | 23.5,30.48 24.13,30.48 26.04,28.57 | 23.5,30.48 21.91,30.48 S7.1 | 68.58,33.02 76.83,33.02 78.11,34.29 78.11,36.83 U4.1 | 68.58,33.02 62.23,33.02 58.74,29.53 58.74,25.72 C8.2 | 68.58,33.02 68.58,11.43 63.82,6.67 63.82,2.54 SV6.3
  Bottom 0.381: S7.2 28.26,30.48 39.05,30.48 47.94,21.59 47.94,18.41 63.82,2.54 SV6.3
RS
  Top 0.381: SV3.1 90.81,39.69 97.16,46.04 DIS1.4
RX-I  (via drill 0.61)
  Top 0.381: v21.59,54.29 17.14,54.29 R8.1 | v40.96,56.83 v38.42,56.83
  Bottom 0.381: v21.59,54.29 31.75,54.29 35.56,50.48 35.56,48.9 35.88,48.58 37.15,48.58 38.42,49.85 v38.42,56.83 | v40.96,56.83 40.96,51.44 51.12,41.27 64.77,41.27 65.41,41.91 65.41,44.45 66.04,45.09 67.31,45.09 67.94,44.45 67.94,42.23 68.9,41.27 80.01,41.27 U4.2 82.23,43.5 82.23,45.09 93.98,56.83 93.98,78.11 SV5.1
RXD
  Top 0.381: U1.4 42.23,54.93 45.4,58.1 45.4,66.99 46.04,67.63 46.67,67.63 47.94,68.9 47.94,69.22 49.85,71.12 R9.2
RXLED
  Top 0.381: U1.17 42.23,49.53 39.69,52.07 37.78,52.07 34.29,55.56 LED4.C
SCK  (via drill 0.61)
  Top 0.381: 60.64,70.48 60.64,77.47 60.33,77.79 SV7.6 | v21.27,39.69 20,40.96 17.46,40.96 TP5.P$1 | v29.84,37.15 26.04,37.15 24.77,38.42 SV9.4 | v60.64,69.22 60.64,70.48 | v51.75,47.62 51.75,46.04 50.16,44.45 50.16,34.61 53.02,31.75 57.78,31.75 U4.19 | 60.64,70.48 R1.1
  Bottom 0.381: v21.27,39.69 23.81,39.69 24.77,38.73 SV9.4 | v29.84,37.15 31.11,38.42 61.28,38.42 61.59,38.1 61.59,35.88 U4.19 | v60.64,69.22 60.64,68.58 51.75,59.69 v51.75,47.62
SS
  Top 0.381: U4.16 59.69,41.27 64.77,41.27 65.41,41.91 65.41,58.1 67.63,60.33 67.63,77.79 SV7.3
TX-O  (via drill 0.61)
  Top 0.381: v48.9,68.26 49.85,69.22 R9.1 | v55.24,71.44 v51.44,67.63 | v66.04,74.61 66.04,69.85 v66.67,69.22 | U4.3 82.55,46.35 83.19,46.35 87.63,50.8 87.63,73.98 91.76,78.11 SV5.2
  Bottom 0.381: v48.9,68.26 48.9,73.66 50.16,74.93 51.44,74.93 51.75,74.61 51.75,67.94 v51.44,67.63 | v55.24,71.44 58.42,74.61 v66.04,74.61 | v66.67,69.22 82.87,69.22 91.76,78.11 SV5.2
TXD
  Top 0.381: U1.20 44.13,47.62 41.59,45.09 30.16,45.09 27.3,47.94 20.32,47.94 17.14,51.12 17.14,52.39 R8.2
TXLED
  Top 0.381: U1.10 38.42,55.24 33.34,60.33 32.07,60.33 27.62,55.88 LED3.C
USBVCC  (via drill 0.61)
  Top 0.381: C12.1 13.34,70.8 v13.02,71.12 | v15.24,75.25 15.24,76.2 15.88,76.83 F1.2 | v30.8,15.24 31.75,16.19 Q1.3 | v13.34,52.07 15.88,54.61 15.88,54.93 16.51,55.56 21.91,55.56 22.54,54.93 | 22.54,54.93 22.54,54.61 29.21,47.94 | 29.21,47.94 30.48,46.67 40.01,46.67 40.96,47.62 U1.15 | v26.04,44.45 25.4,45.09 24.77,45.09 C15.A | 29.21,47.94 v29.21,47.62 | v20.64,59.05 22.54,57.15 22.54,54.93
  Bottom 0.381: v15.24,75.25 13.02,73.03 v13.02,71.12 11.43,71.12 11.11,70.8 11.11,65.41 17.46,59.05 v20.64,59.05 | v30.8,15.24 27.3,15.24 13.34,29.21 v13.34,52.07 | v29.21,47.62 v26.04,44.45
VIN  (via drill 0.61)
  Top 0.381: D1.C 16.83,9.84 16.83,10.48 v19.68,13.34 20.64,14.29 IC3.3 20.64,14.61 17.78,17.46 17.78,20 C5.+ | v65.41,5.08 73.98,5.08 75.25,3.81 75.25,3.49 76.2,2.54 SV6.8 | v60.64,9.21 53.66,9.21 v53.34,8.89
  Bottom 0.381: v65.41,5.08 61.28,9.21 v60.64,9.21 | v53.34,8.89 46.04,8.89 40.64,3.49 29.53,3.49 v19.68,13.34
VUSB
  Top 0.381: 13.34,75.88 13.34,76.83 F1.1 | 13.34,75.88 13.34,75.56 16.19,72.71 18.73,72.71 C10.1 | 13.34,75.88 8.89,75.88 U$13.VBUS